# Altium PCB Badschematic.PcbDoc
Units mil, origin at the board's own origin, x right, y up, seen from the top; angles counter-clockwise.
Board outline 6000 x 4000 mil, 2 copper layers (Top Layer, Bottom Layer); 15 components, 11 nets, 108 pads, 10 vias.
Unrouted connection lines stored in the file: 17.
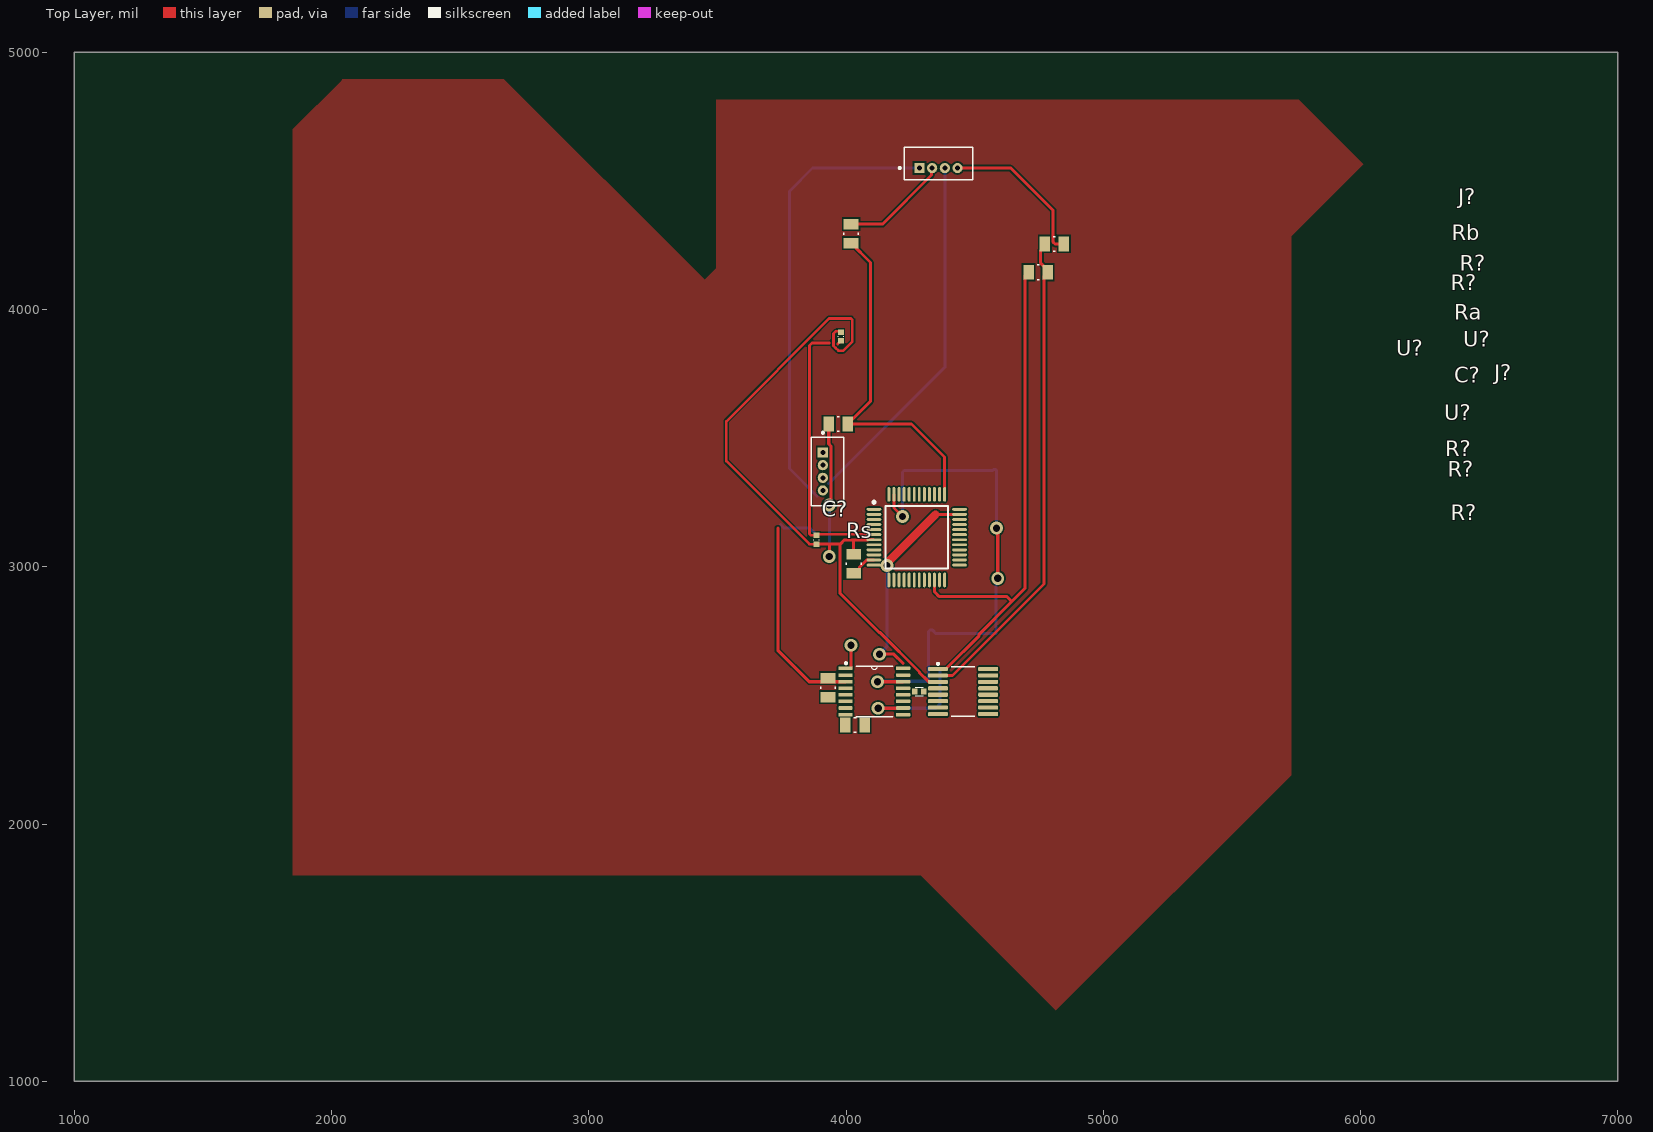
[diagram p0: Top Layer view]
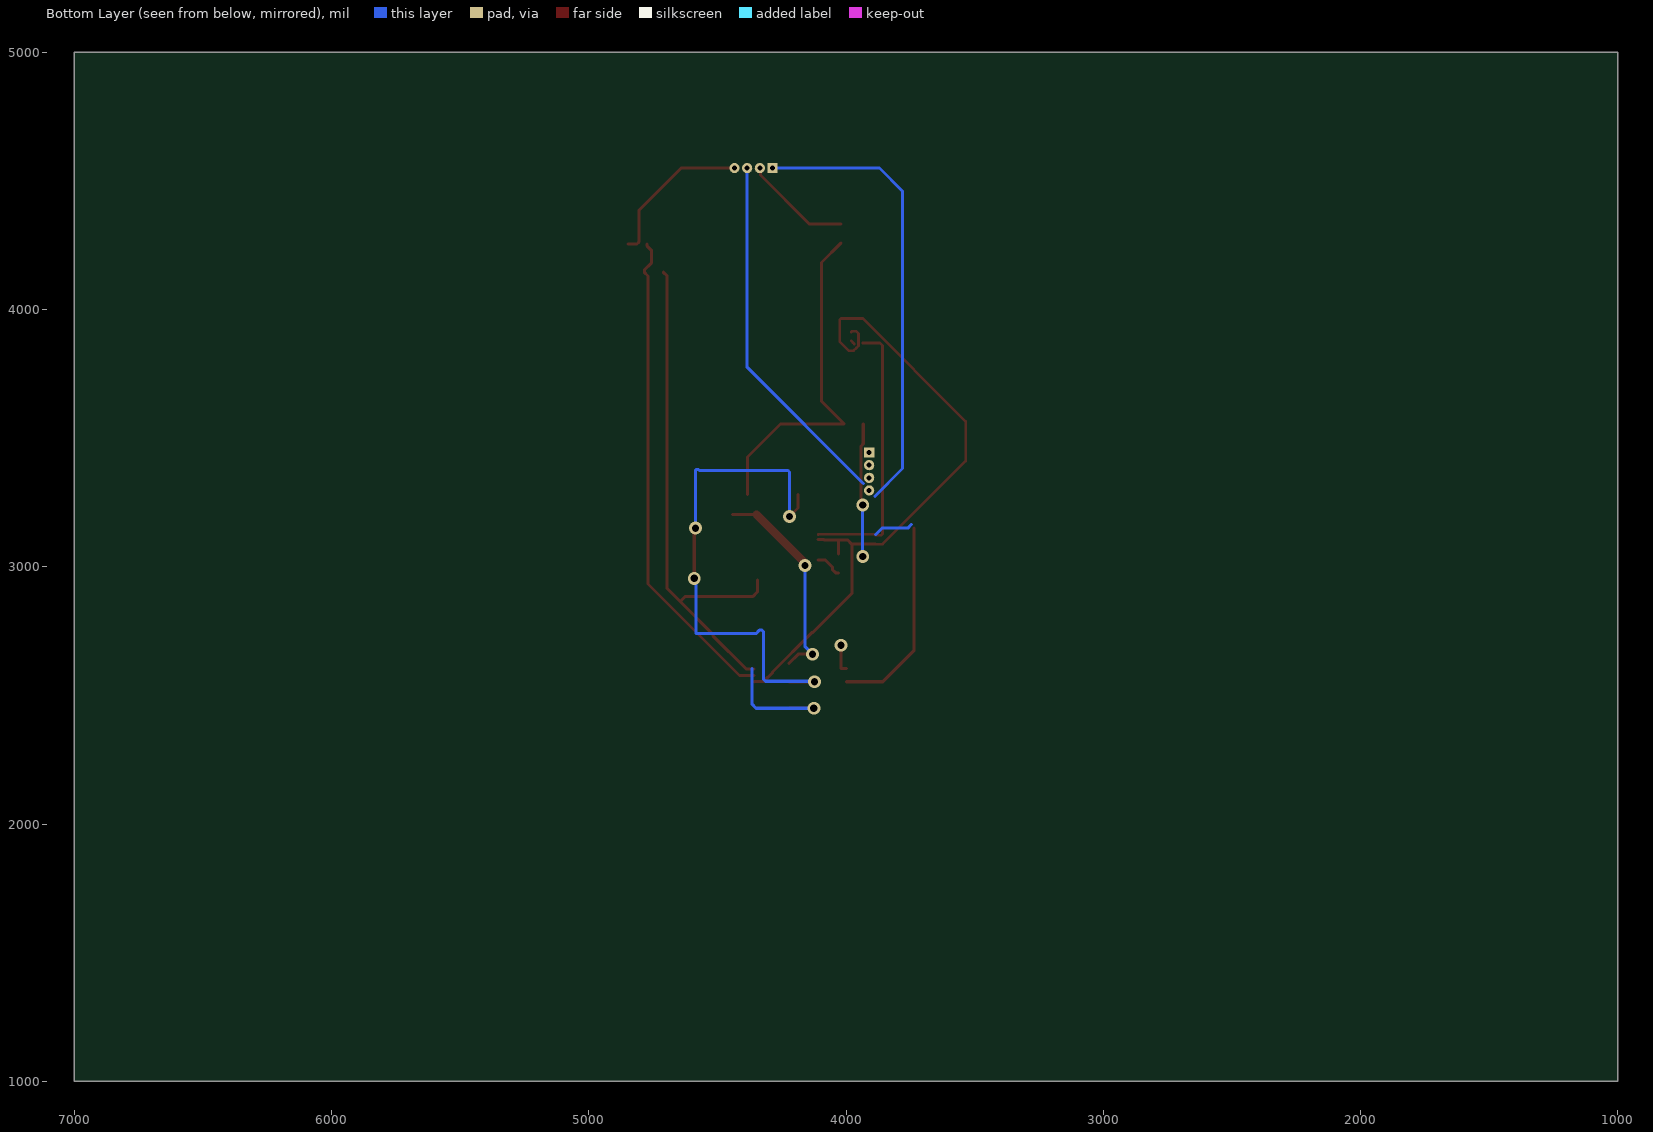
[diagram p1: Bottom Layer view, seen from below]

## Layer stack, top to bottom
Top Solder: solder mask 0.4, Solder Resist, Dk 3.5
Top Layer: signal copper 1.4
Dielectric 1: dielectric 12.6, FR-4, Dk 4.8
Bottom Layer: signal copper 1.4
Bottom Solder: solder mask 0.4, Solder Resist, Dk 3.5

## Board outline
1000,1000 7000,1000 7000,5000 1000,5000

## Design rules (kind name [scope] priority, off if disabled: settings)
Clearance [All] p1: gap=6 ignorepadtopadclearanceinfootprint=FALSE except(5.98: Arc-Hole Track-Hole SMDPad-Hole THPad-Hole Via-Hole Fill-Hole Poly-Hole Region-Hole Text-Hole)
HoleSize [All] p1: absolutevalues=TRUE maxlimit=244.09 minlimit=11.81 maxpercent=80.000 minpercent=20.000
MinimumAnnularRing [All] p1: minimumring=5.91
MinimumSolderMaskSliver [All] p1: minsoldermaskwidth=3.94
PolygonConnect ViaConnect [IsVia] p1: connectstyle=Direct reliefconductorwidth=10 reliefentries=4 polygonreliefangle="90 Angle" airgapwidth=10
PolygonConnect [All] p2: connectstyle=Relief reliefconductorwidth=10 reliefentries=4 polygonreliefangle="90 Angle" airgapwidth=10
RoutingVias [All] p1: holewidth=11.81 width=23.62 viastyle="Through Hole" minholewidth=11.81 minwidth=19.68 maxholewidth=39.37 maxwidth=196.85
SilkToSilkClearance [All] p1: silktosilkclearance=3.94
SilkToSolderMaskClearance [IsPad] p1: minsilkscreentomaskgap=3.94 clearancetoexposedcopper=TRUE
SolderMaskExpansion [All] p1: expansion=2 istentingtop=FALSE
SupplyNets "Schematic Supply Nets_2" [InNet('3v3')] p1: voltage=0.000
SupplyNets "Schematic Supply Nets_1" [InNet('GND')] p2: voltage=0.000
Width [All] p1: maxlimit=1000 minlimit=5.91 preferedwidth=11.81
26 further rules are at their usual default settings.

## Classes and differential pairs
component class Badschematic: C? J? R? Ra Rb Rs U?

## Components (designator, comment, footprint, x,y, rotation, side; value= is the part's Value field where it differs from the comment)
C? "*" CAPACITOR_0402_1005M_55N 3980,3895 r270 top
C? "*" CAPACITOR_0402_1005M_55N 3885,3105 r90 top
J? "0530470410" MOLEX_0530470410 3910,3444.21 r90 top
J? "0530470410" MOLEX_0530470410 4285.79,4550 r180 top
R? "*" CAPACITOR_0402_1005M_55N 4285,2515 r0 top
R? "*" RESISTOR_0805_2012M-50N 4035,2385 r0 top
R? "*" RESISTOR_0805_2012M-50N 3930,2530 r90 top
R? "*" Resistor_0805_2012M-50N 4747.01,4145 r180 top
R? "*" Resistor_0805_2012M-50N 4810,4255 r180 top
Ra "*" Resistor_0805_2012M-50N 3970,3555 r0 top
Rb "*" Resistor_0805_2012M-50N 4020,4295 r90 top
Rs "*" Resistor_0805_2012M-50N 4030,3012.01 r90 top
U? "ADC128S052QCMT" TSSOP-16N_4.4mmBody-1.2mm 4110,2515 r0 top
U? "MSP430FR2355TPT" LQFP_PT_48_N 4275,3115 r0 top
U? "LT6222IGN#PBFA" SSOP-16N-3.9mmBody-1.75mm 4455,2515 r0 top

## Footprints (in the part's own frame and the unit in brackets; to place one, negate y for a bottom-side part, rotate by r counter-clockwise, add the part's x,y. Pads: shape width x height; smd on the part's side, far side on the other; paste and mask are expansions set on the pad)
CAPACITOR_0402_1005M_55N [mm] "Capacitor, 0402 (1005 metric), 0.55mm height, nominal pads"
  rect 0.54x0.6 smd mask+0.051: 1(-0.432,0) 2(0.432,0)
  silkscreen extent -0.03,-0.28 0.03,0.28, body extent -0.5,-0.28 0.5,0.27, height 0.48
LQFP_PT_48_N [mm]
  oval 1.45x0.28 smd paste+0 mask+0.051: 1(-4.225,2.75) 2(-4.225,2.25) 3(-4.225,1.75) 4(-4.225,1.25) 5(-4.225,0.75) 6(-4.225,0.25) 7(-4.225,-0.25) 8(-4.225,-0.75) 9(-4.225,-1.25) 10(-4.225,-1.75) 11(-4.225,-2.25) 12(-4.225,-2.75) 25(4.225,-2.75) 26(4.225,-2.25) 27(4.225,-1.75) 28(4.225,-1.25) 29(4.225,-0.75) 30(4.225,-0.25) 31(4.225,0.25) 32(4.225,0.75) 33(4.225,1.25) 34(4.225,1.75) 35(4.225,2.25) 36(4.225,2.75)
  oval 0.28x1.45 smd paste+0 mask+0.051: 13(-2.75,-4.225) 14(-2.25,-4.225) 15(-1.75,-4.225) 16(-1.25,-4.225) 17(-0.75,-4.225) 18(-0.25,-4.225) 19(0.25,-4.225) 20(0.75,-4.225) 21(1.25,-4.225) 22(1.75,-4.225) 23(2.25,-4.225) 24(2.75,-4.225) 37(2.75,4.225) 38(2.25,4.225) 39(1.75,4.225) 40(1.25,4.225) 41(0.75,4.225) 42(0.25,4.225) 43(-0.25,4.225) 44(-0.75,4.225) 45(-1.25,4.225) 46(-1.75,4.225) 47(-2.25,4.225) 48(-2.75,4.225)
  silkscreen extent -4.35,-3.1 3.1,3.57, body extent -4.5,-4.5 4.5,4.5, height 1.6
MOLEX_0530470410 [mm]
  rect 1.008x1.008 hole 0.5 mask+0.051: 1(0,0)
  round 1.008 hole 0.5 mask+0.051: 2(-1.25,0) 3(-2.5,0) 4(-3.75,0)
  silkscreen extent -5.25,-2.05 2.05,1.15, body extent -5.25,-2.06 1.5,1.14, height 4.21
RESISTOR_0805_2012M-50N [mm] "Resistor, 0805 (2012 metric), nominal pads"
  rect 1.04x1.47 smd mask+0.051: 1(-0.94,0) 2(0.94,0)
  silkscreen extent -0.1,-0.72 0.1,0.72, body extent -1,-0.63 1,0.62, height 0.5
Resistor_0805_2012M-50N [mm] "Resistor, 0805 (2012 metric), nominal pads"
  rect 1.04x1.47 smd mask+0.051: 1(-0.94,0) 2(0.94,0)
  silkscreen extent -0.1,-0.72 0.1,0.72, body extent -1,-0.63 1,0.62, height 0.5
SSOP-16N-3.9mmBody-1.75mm [mm] "SSOP, 16 pins, 3.9mm wide body, 1.75mm high"
  rrect50% 1.96x0.41 smd mask+0.051: 1(-2.475,2.222) 2(-2.475,1.587) 3(-2.475,0.953) 4(-2.475,0.318) 5(-2.475,-0.318) 6(-2.475,-0.953) 7(-2.475,-1.587) 8(-2.475,-2.222) 9(2.475,-2.222) 10(2.475,-1.587) 11(2.475,-0.953) 12(2.475,-0.318) 13(2.475,0.318) 14(2.475,0.953) 15(2.475,1.587) 16(2.475,2.222)
  silkscreen extent -2.57,-2.44 1.17,2.83, body extent -3,-2.44 3,2.44, height 1.75
TSSOP-16N_4.4mmBody-1.2mm [mil] "TSSOP, 0.65mm pitch, 4.4mm body, 1.2mm high, nominal pads"
  rrect50% 56x14 smd mask+2: 1(-112,90) 2(-112,64) 3(-112,38) 4(-112,13) 5(-112,-13) 6(-112,-38) 7(-112,-64) 8(-112,-90) 9(112,-90) 10(112,-64) 11(112,-38) 12(112,-13) 13(112,13) 14(112,38) 15(112,64) 16(112,90)
  silkscreen extent -114,-98 71,114, body extent -126,-98 126,98, height 46

## Part data
C? C?: library part "GCM1555CxxxxxF Series", "Passive - Capacitor Series, 0402, C0G, 50V, ±1%, -55°C ~ 125°C, 0402 (1005 Metric)", Capacitance at Rated Voltage=100%, Package=0402, Rated Voltage=50V, Temp Range="-55°C ~ 125°C", Temperature Coefficient=C0G, Tolerance=±1%, Value Range="5pF ~ 1nF", E Series=E24, Supplier 1=Digikey
J? J?: "Header - Picoblade 04-pin, TH, STR", Supplier 1 Part No.=530470410, MF Part No.=0530470410, Mounting Type=Through-hole, Orientation=Straight, Pins=4, Pitch=1.25mm, Supplier 1=Digikey
R? R? R?: library part "Generic Resistor", "Passive - Resistor, Generic", Tolerance=?%
R? R? Ra Rb Rs: library part "RMCF0805JT Series", "Passive - Resistor Series, 0805, 5%, 100m - 22M, E24, 0.063W, 1/16W, ±200ppm/°C, -55°C ~ 155°C, 0805 (2012 Metric)", Package=0805, Power=1/8W, Rated Voltage=150V, Temp Range="-55°C ~ 155°C", Temperature Coefficient=±200ppm/°C, Tolerance=5%, Value Range="100m ~ 22M", E Series=E24, Supplier 1=Digikey
U?: "IC - ADC, 8-Channel, 12-bit, SPI, Split digital/analog Vcc", MF Part No.=ADC128S052QCMT/NOPB-ND, Package=TSSOP-16, Rated Voltage=5.25V, Supplier 1 Part No.=ADC128S052CIMT/NOPB-ND, Temp Range="-40°C ~ 105°C", Supplier 1=Digikey
U?: "IC - Microcontroller, 24MHz, 32KB FRAM, Op-Amps/PGAs, 12-bit DACs, 12-bit ADC, 48-LQFP, -40 to 105C", Package=LQFP-48, Rated Voltage=3.6V, Supplier 1 Part No.=296-50260-ND, Temp Range="-40°C ~ 105°C", MF Part No.=MSP430FR2355TPT, Supplier 1=Digikey
U?: library part LT6222IGN#PBF, "IC - Opamp, High Speed, 4-Channel, 60MHz GBWP, RRIO, 2.2V to 12.6V, -40 to 85, SSOP-16", Package=TSSOP-16, Rated Voltage=12.6V, Supplier 1 Part No.=LT6222IGN#PBF-ND, Temp Range="-40°C ~ 85°C", MF Part No.=LT6222IGN#PBF, Supplier 1=Digikey

## Via types
v1: diameter 50, hole 28, Top Layer to Bottom Layer, 10 vias

## Nets (pads, with @x,y where several pads share a name; then routed paths per layer and width w, separated by ;. In a path a pad name is that pad's centre, name@x,y a point inside that pad or via, vN(x,y) a via of type N, cw(c..) or ccw(c..) an arc to the next point about the centre after c; other vN are vias at no path point)
3V3: C?.2 U?.3@3998,2553 U?.6@4108.66,3124.84 | length 2031.4
  Top Layer w10: 3935.33,3870 3868.22,3870 3858.19,3859.97 3858.19,3127.87 3864.05,3122.01 3885,3122.01 3888.66,3125.67 4107.83,3125.67 U?.6@4108.66,3124.84 ; 3967.33,3865.83 3973.19,3871.68 3973.19,3872.36 3978.82,3877.99 C?.2@3980,3877.99
  Top Layer w11.81: 3735,3150 3735,2675 3857,2553 U?.3@3998,2553
  Bottom Layer w11.81: 3745,3165 3760,3150 3860,3150 3885,3125
GND: C?.1 R?.1@3997.99,2385 R?.2@3930,2567.01 R?.2@4710,4145 Ra.1 Rs.2 U?.1@3998,2605 U?.1@4357.56,2602.5 U?.3@4357.56,2552.5 U?.7@4108.66,3105.16 U?.10@4222,2451 U?.22 | length 5803.9
  Top Layer w10: C?.1@3885,3087.99 3858.19,3087.99 3535,3411.18 3535,3565.62 3934.38,3965 4019.14,3965 4025,3959.14 4025,3875 3990,3840 3970,3840 3960,3850 3960,3850.53 3951.33,3859.2 3951.33,3906.33 3960,3915 3977.01,3915 C?.1@3980,3912.01
  Top Layer w11.81: C?.1@3885,3087.99 3940,3087.99 ; v1@3932.99,3232.01 3941.75,3240.76 3941.75,3468.99 3932.99,3477.74 Ra.1 ; v1(3935,3040) 3935,3082.99 3940,3087.99 ; U?.1@3998,2605 4018.91,2605 4020,2606.09 v1(4020,2695) ; Rs.2 4030,3104.76 ; U?.7@4108.66,3105.16 4086.42,3105.16 4086.02,3104.76 4030,3104.76 ; v1(4125,2450) 4221,2450 U?.10@4222,2451 ; U?.22 4343.9,2902.4 4362.6,2883.7 4626.1,2883.7 4644.8,2865 ; U?.3@4357.56,2552.5 4355.39,2554.67 4319.27,2554.67 4286.07,2587.86 4286.07,2590.71 4133.22,2743.56 4130.37,2743.56 3977.52,2896.41 3977.52,3087.99 ; U?.1@4357.56,2602.5 4388.07,2602.5 4517.52,2731.95 4517.52,2737.72 4644.8,2865 ; R?.2@4710,4145 4695.43,4130.43 4695.43,2915.63 4644.8,2865 ; 3940,3087.99 3977.52,3087.99 ; 3977.52,3087.99 3994.29,3104.76 4030,3104.76
  Bottom Layer w11.81: v1(3935,3040) v1(3935,3240) ; v1(4125,2450) 4350,2450 4365,2465 4365,2605
NetJ?_1: J?.1@3910,3444.21 J?.2@3910,3395 U?.12@4108.66,3006.73 U?.13@4166.73,2948.66
NetJ?_2: J?.2@4335,4550 Rb.2 | length 419.9
  Top Layer w11.81: Rb.2 4142.01,4332.01 4332.75,4522.75 4332.75,4547.75 J?.2@4335,4550
NetJ?_3: J?.3@3910,3345.79 U?.42
NetJ?_4: J?.4@4433.43,4550 R?.1@4847.01,4255 | length 608
  Top Layer w11.81: J?.4@4433.43,4550 4640.54,4550 4805.37,4385.17 4805.37,4261.92 4812.29,4255 R?.1@4847.01,4255
NetR?_1: R?.1@4267.99,2515 R?.2@4302.01,2515 U?.4@3998,2528
NetRa_2: Ra.2 Rb.1 U?.37 | length 1345.3
  Top Layer w11.81: Rb.1 4095,4182.99 4095,3642.99 Ra.2 4255,3555 4383.27,3426.73 U?.37
NetRs_1: Rs.1 U?.11@4108.66,3026.42 | length 105.3
  Top Layer w11.81: Rs.1 4038.46,2975 4053.03,2989.57 4053.03,2998.77 4080.29,3026.02 4108.27,3026.02 U?.11@4108.66,3026.42
NetU?_14: U?.14@4222,2553 U?.15@4222,2579 U?.47 | length 2032.5
  Top Layer w11.81: v1@4120,2550 v1(4123,2553) U?.14@4222,2553 ; U?.47 4186.42,3228.58 v1(4220,3195) ; v1(4590,2955) v1@4590,3140
  Bottom Layer w11.81: v1(4123,2553) 4125,2555 4313.08,2555 4320,2561.92 4320,2746.38 4326.92,2753.3 4336.7,2753.3 4350,2740 4583.08,2740 4583.08,2948.08 v1(4590,2955) ; v1(4220,3195) 4220,3368.08 4226.92,3375 4570,3375 4573.3,3378.3 4583.08,3378.3 4585,3376.38 v1(4585,3150)
NetU?_16: U?.16@4222,2605 U?.35 | length 369.9
  Top Layer w11.81: 4348.58,3203.58 U?.35
  Top Layer w31.5: 4158.95,3005 4158.95,3013.95 4348.58,3203.58
pads on no net: J?.1@4285.79,4550 J?.3@4384.21,4550 J?.4@3910,3296.57 R?.1@3930,2492.99 R?.1@4784.02,4145 R?.2@4072.01,2385 R?.2@4772.99,4255 U?.1@4108.66,3223.27 U?.2 U?.3@4108.66,3183.9 U?.4@4108.66,3164.21 U?.4@4357.56,2527.5 U?.5 U?.6@3998,2477 U?.6@4357.56,2477.5 U?.7@3998,2451 U?.7@4357.56,2452.5 U?.8 U?.9 U?.10@4108.66,3046.1 U?.10@4552.44,2452.5 U?.11@4222,2477 U?.11@4552.44,2477.5 U?.12@4222,2502 U?.12@4552.44,2502.5 U?.13@4222,2528 U?.13@4552.44,2527.5 U?.14@4186.42,2948.66 U?.14@4552.44,2552.5 U?.15@4206.1,2948.66 U?.15@4552.44,2577.5 U?.16@4225.79,2948.66 U?.16@4552.44,2602.5 U?.17 U?.18 U?.19 U?.20 U?.21 U?.23 U?.24 U?.25 U?.26 U?.27 U?.28 U?.29 U?.30 U?.31 U?.32 U?.33 U?.34 U?.36 U?.38 U?.39 U?.40 U?.41 U?.43 U?.44 U?.45 U?.46 U?.48
copper on no net: | length 5556.2
  Top Layer w11.81: v1(4130,2660) 4185.91,2660 4222,2623.91 ; 4357.56,2577.5 4413.86,2577.5 4769.45,2933.09 4769.45,4130.43 4784.02,4145 4784.02,4153.46 4757.01,4180.47 4757.01,4230.55 4772.99,4246.54 4772.99,4255
  Bottom Layer w11.81: 3887.55,3274.13 3780,3381.68 3780,4460 3870,4550 4285.79,4550 ; 3932.45,3323.34 4384.21,3775.1 4384.21,4550 ; v1(4130,2660) 4158.95,2688.95 v1(4158.95,3005)

## Polygon pours and split planes (outlines as drawn)
no net on Top Layer "NONET_L01_P001" (solid, pour order 1): 2040,4890 1850,4700 1850,1800 4290,1800 4815,1275 5730,2190 5730,4285 6010,4565 5760,4815 3495,4815 3495,4160 3450,4115 2670,4895 2030,4895